# Altium PCB mini_backplane.PcbDoc (part 4 of 5)
Units mm, origin at the board's own origin, x right, y up, seen from the top; angles counter-clockwise.
Board outline 232.03 x 195 mm, 5 copper layers (Top Layer, MidLayer1, GND, POWER, Bottom Layer); 241 components, 200 nets, 1637 pads, 676 vias.
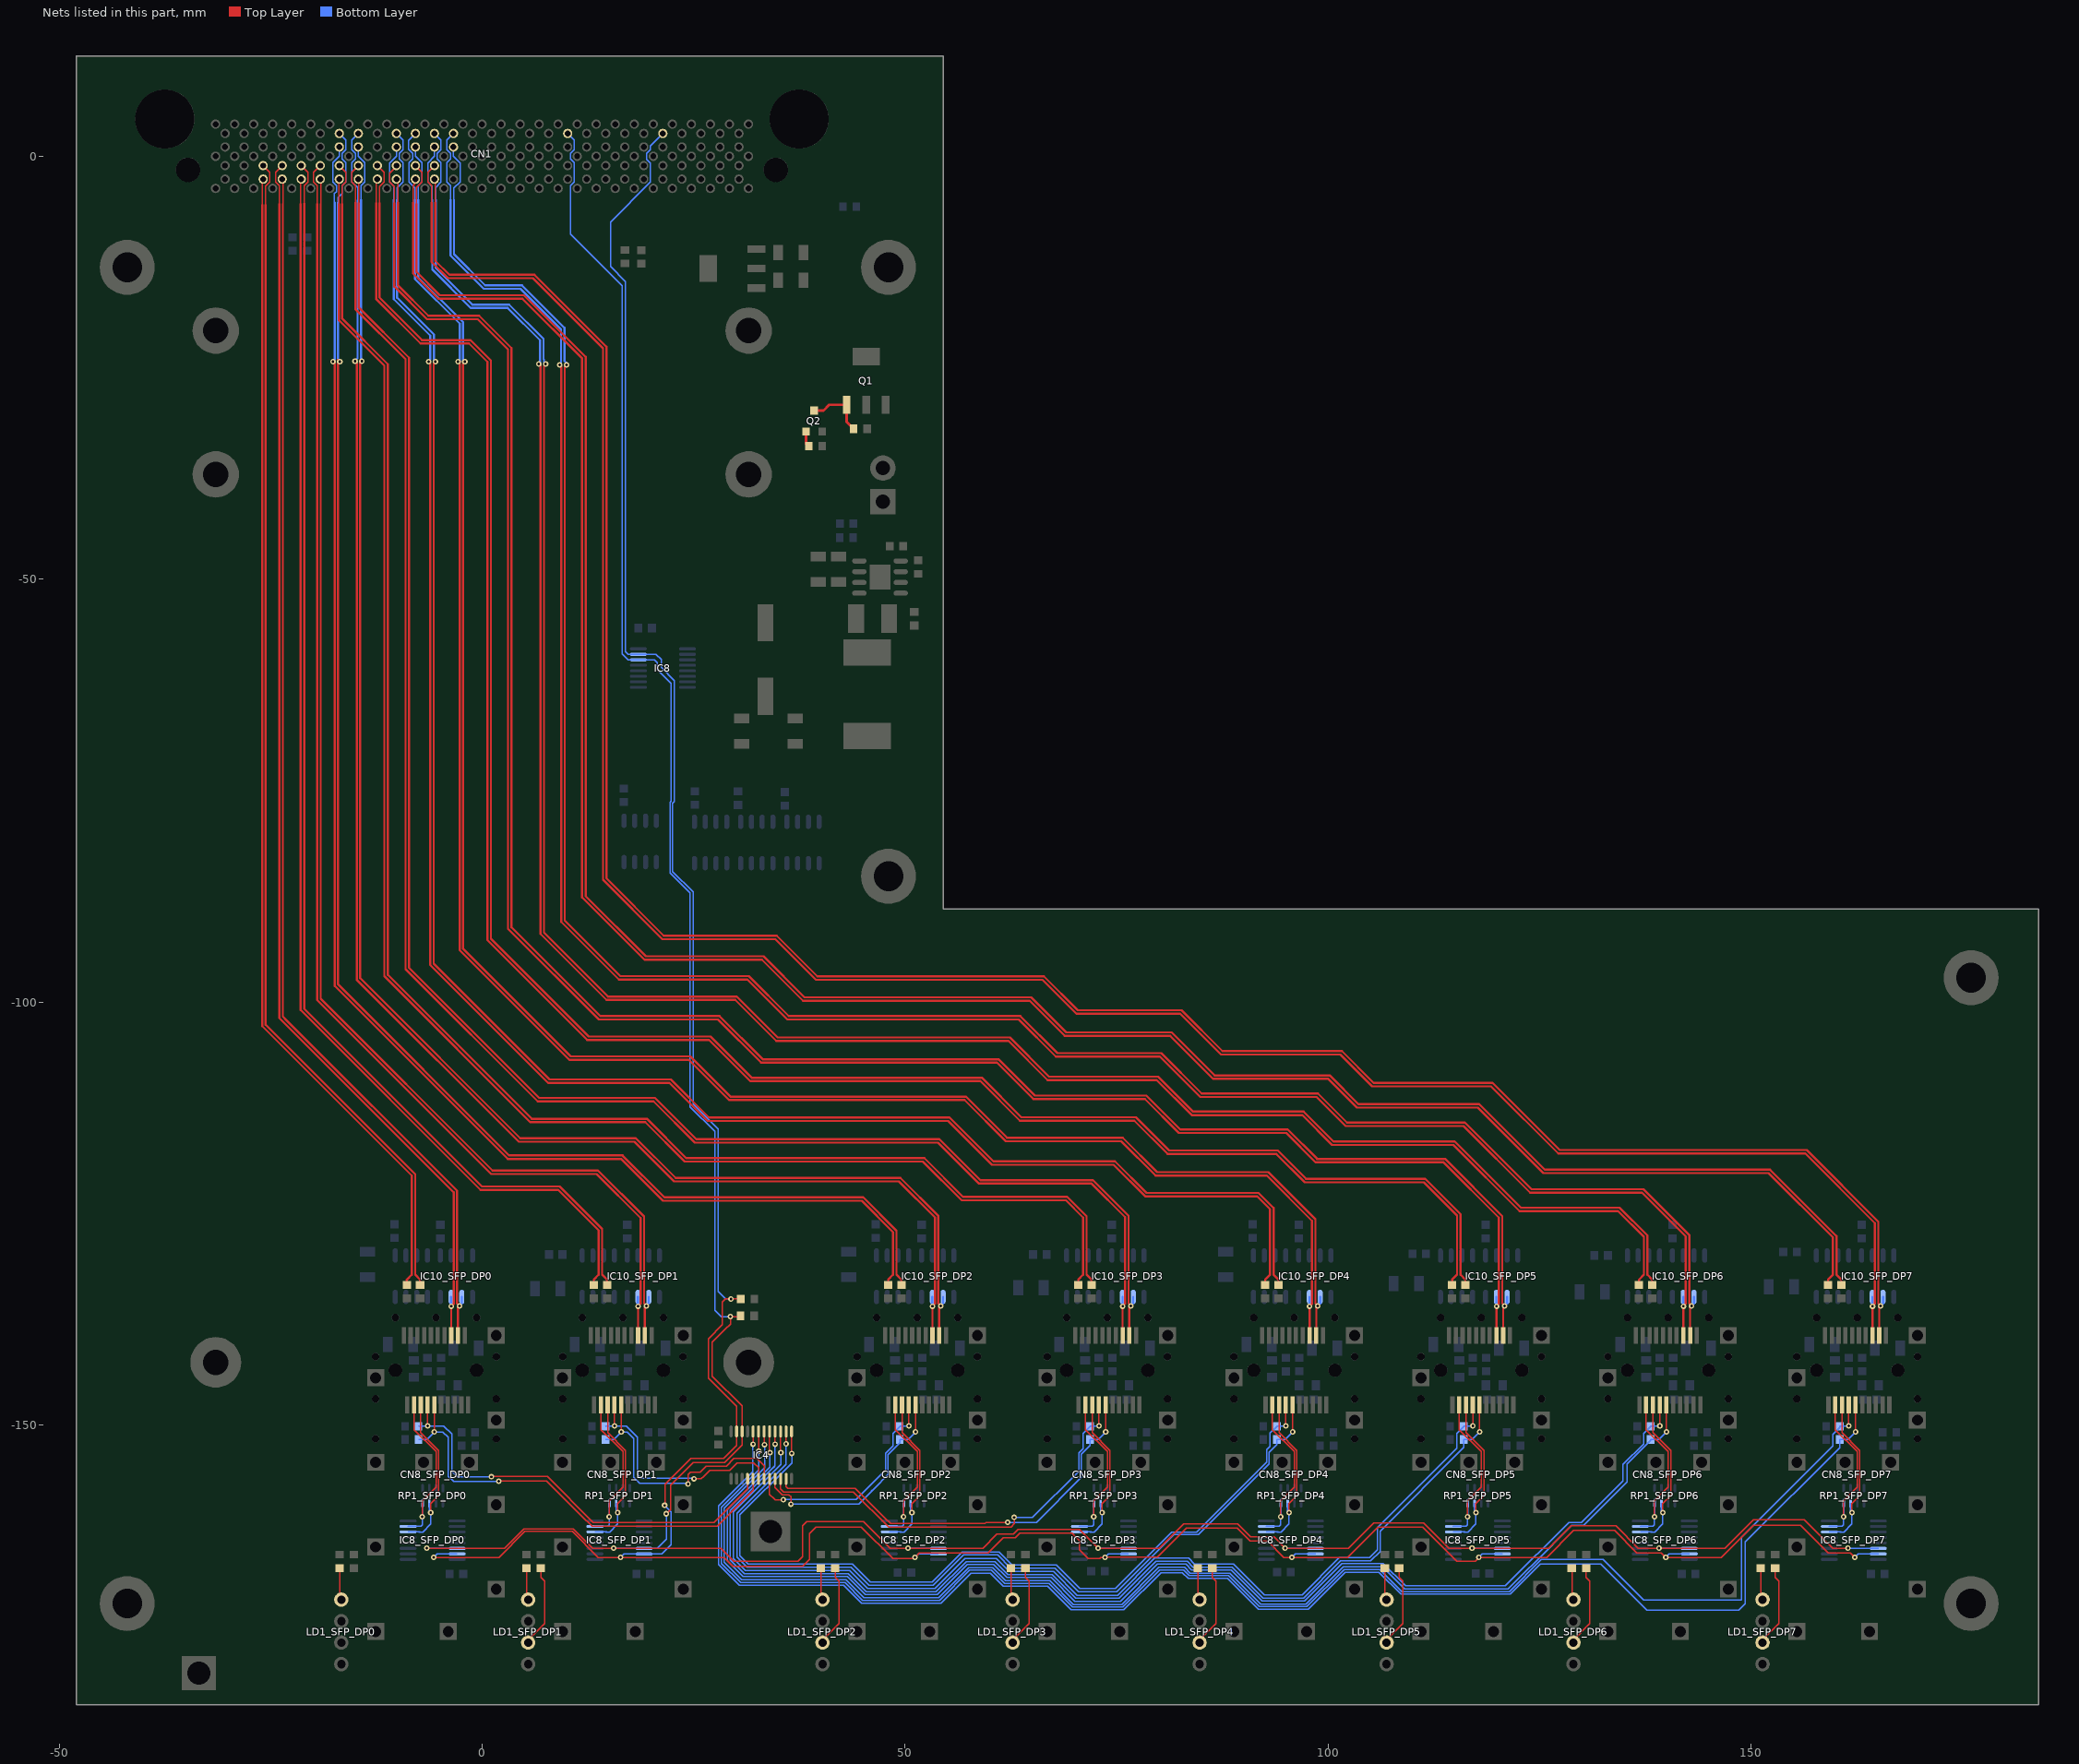
[diagram p6: the nets of this part, all layers, seen from the top]

## Via types
v1: diameter 0.66, hole 0.305, Top Layer to Bottom Layer, tented both sides, 576 vias
v2: diameter 0.711, hole 0.33, Top Layer to Bottom Layer, tented both sides, 97 vias
v3: diameter 0.66, hole 0.305, Top Layer to Bottom Layer, 3 vias

## Nets (pads, with @x,y where several pads share a name; then routed paths per layer and width w, separated by ;. In a path a pad name is that pad's centre, name@x,y a point inside that pad or via, vN(x,y) a via of type N, cw(c..) or ccw(c..) an arc to the next point about the centre after c; other vN are vias at no path point) (continued)
NetLD1_SFP_DP0_4: LD1_SFP_DP0.4 R10_SFP_DP0.2 | length 3.6
  Top Layer w0.152: R10_SFP_DP0.2@-16.841,-166.957 -16.815,-166.982 LD1_SFP_DP0.4@-16.815,-170.551
NetLD1_SFP_DP1_2: LD1_SFP_DP1.2 R9_SFP_DP1.2 | length 9.7
  Top Layer w0.152: LD1_SFP_DP1.2@5.283,-175.631 7.391,-173.523 7.391,-168.493 6.959,-168.062 R9_SFP_DP1.2@6.959,-166.957
NetLD1_SFP_DP1_4: LD1_SFP_DP1.4 R10_SFP_DP1.2 | length 3.6
  Top Layer w0.152: R10_SFP_DP1.2@5.257,-166.957 5.283,-166.982 LD1_SFP_DP1.4@5.283,-170.551
NetLD1_SFP_DP2_2: LD1_SFP_DP2.2 R9_SFP_DP2.2 | length 9.7
  Top Layer w0.152: LD1_SFP_DP2.2@40.081,-175.631 42.189,-173.523 42.189,-168.493 41.757,-168.062 R9_SFP_DP2.2@41.757,-166.957
NetLD1_SFP_DP2_4: LD1_SFP_DP2.4 R10_SFP_DP2.2 | length 3.6
  Top Layer w0.152: LD1_SFP_DP2.4@40.081,-170.551 R10_SFP_DP2.2@40.081,-166.982
NetLD1_SFP_DP3_2: LD1_SFP_DP3.2 R9_SFP_DP3.2 | length 9.7
  Top Layer w0.152: LD1_SFP_DP3.2@62.56,-175.631 64.668,-173.523 64.668,-168.493 64.236,-168.062 R9_SFP_DP3.2@64.236,-166.957
NetLD1_SFP_DP3_4: LD1_SFP_DP3.4 R10_SFP_DP3.2 | length 3.6
  Top Layer w0.152: R10_SFP_DP3.2@62.534,-166.957 62.56,-166.982 LD1_SFP_DP3.4@62.56,-170.551
NetLD1_SFP_DP4_2: LD1_SFP_DP4.2 R9_SFP_DP4.2 | length 9.7
  Top Layer w0.152: LD1_SFP_DP4.2@84.658,-175.631 86.766,-173.523 86.766,-168.493 86.334,-168.062 R9_SFP_DP4.2@86.334,-166.957
NetLD1_SFP_DP4_4: LD1_SFP_DP4.4 R10_SFP_DP4.2 | length 3.6
  Top Layer w0.152: R10_SFP_DP4.2@84.632,-166.957 84.658,-166.982 LD1_SFP_DP4.4@84.658,-170.551
NetLD1_SFP_DP5_2: LD1_SFP_DP5.2 R9_SFP_DP5.2 | length 9.7
  Top Layer w0.152: LD1_SFP_DP5.2@106.756,-175.631 108.864,-173.523 108.864,-168.493 108.432,-168.062 R9_SFP_DP5.2@108.432,-166.957
NetLD1_SFP_DP5_4: LD1_SFP_DP5.4 R10_SFP_DP5.2 | length 3.6
  Top Layer w0.152: R10_SFP_DP5.2@106.73,-166.957 106.756,-166.982 LD1_SFP_DP5.4@106.756,-170.551
NetLD1_SFP_DP6_2: LD1_SFP_DP6.2 R9_SFP_DP6.2 | length 9.7
  Top Layer w0.152: LD1_SFP_DP6.2@128.854,-175.631 130.962,-173.523 130.962,-168.493 130.53,-168.062 R9_SFP_DP6.2@130.53,-166.957
NetLD1_SFP_DP6_4: LD1_SFP_DP6.4 R10_SFP_DP6.2 | length 3.6
  Top Layer w0.152: R10_SFP_DP6.2@128.828,-166.957 128.854,-166.982 LD1_SFP_DP6.4@128.854,-170.551
NetLD1_SFP_DP7_2: LD1_SFP_DP7.2 R9_SFP_DP7.2 | length 9.7
  Top Layer w0.152: LD1_SFP_DP7.2@151.206,-175.631 153.314,-173.523 153.314,-168.493 152.882,-168.062 R9_SFP_DP7.2@152.882,-166.957
NetLD1_SFP_DP7_4: LD1_SFP_DP7.4 R10_SFP_DP7.2 | length 3.6
  Top Layer w0.152: R10_SFP_DP7.2@151.18,-166.957 151.206,-166.982 LD1_SFP_DP7.4@151.206,-170.551
NetQ1_1: Q1.1 Q2.3 R6.1 | length 7.3
  Top Layer w0.305: Q2.3@39.268,-30.058 40.366,-30.058 41.041,-29.383 Q1.1@43.115,-29.383 43.115,-31.408 R6.1@43.929,-32.222
NetQ2_1: Q2.1 R11.1 | length 1.8
  Top Layer w0.305: Q2.1@38.318,-32.558 38.318,-33.977 R11.1@38.62,-34.28
RD_OUT_SFP_DP0_N: CN1.159 CN8_SFP_DP0.12 IC10_SFP_DP0.2 | length 148.6
  Top Layer w0.152: CN1.159@-23.625,-2.7 -23.546,-2.779 -23.546,-5.654
  Top Layer w0.254: -23.546,-5.654 -23.546,-101.726 -22.891,-102.382 ; -23.297,-101.976 -22.891,-102.382 ; -2.843,-138.293 CN8_SFP_DP0.12@-2.843,-139.44 -2.843,-137.124 ; -2.843,-136.919 -2.843,-137.124 ; -22.891,-102.382 -2.947,-122.326 -2.947,-135.651 v1(-2.667,-135.931) -2.843,-136.107 -2.843,-137.124
  Bottom Layer w0.254: v1(-2.667,-135.931) -2.388,-135.651 IC10_SFP_DP0.2@-2.388,-134.875
RD_OUT_SFP_DP0_P: CN1.160 CN8_SFP_DP0.13 IC10_SFP_DP0.3 | length 149.8
  Top Layer w0.152: -23.953,-5.629 -23.953,-3.474 -24.404,-3.022 -24.404,-1.878 CN1.160@-23.625,-1.1
  Top Layer w0.254: -23.953,-5.629 -23.953,-101.895 -3.353,-122.494 -3.353,-135.702 v1(-3.633,-135.981) ; -3.643,-138.293 CN8_SFP_DP0.13@-3.643,-139.44 v1@-3.643,-135.992
  Bottom Layer w0.254: IC10_SFP_DP0.3@-3.658,-134.875 -3.658,-135.956 v1(-3.633,-135.981)
RD_OUT_SFP_DP1_N: CN1.153 CN8_SFP_DP1.12 IC10_SFP_DP1.2 | length 162.6
  Top Layer w0.152: CN1.153@-19.125,-2.7 -19.076,-2.749 -19.076,-5.629
  Top Layer w0.254: -19.076,-5.629 -19.076,-99.609 1.244,-119.929 13.706,-119.929 19.151,-125.374 19.151,-135.651 v1(19.431,-135.931) 19.255,-136.107 19.255,-137.124 ; 19.255,-138.293 CN8_SFP_DP1.12@19.255,-139.44 19.255,-137.124 ; 19.255,-136.919 19.255,-137.124
  Bottom Layer w0.254: v1(19.431,-135.931) 19.71,-135.651 IC10_SFP_DP1.2@19.71,-134.875
RD_OUT_SFP_DP1_P: CN1.154 CN8_SFP_DP1.13 IC10_SFP_DP1.3 | length 164.3
  Top Layer w0.152: -19.482,-5.654 -19.472,-5.644 -19.472,-3.455 -19.904,-3.022 -19.904,-1.878 CN1.154@-19.125,-1.1
  Top Layer w0.254: -19.482,-5.654 -19.482,-99.777 1.076,-120.335 13.538,-120.335 18.745,-125.542 18.745,-135.702 v1(18.465,-135.981) ; 18.455,-138.293 CN8_SFP_DP1.13@18.455,-139.44 v1@18.455,-135.992
  Bottom Layer w0.254: IC10_SFP_DP1.3@18.44,-134.875 18.44,-135.956 v1(18.465,-135.981)
RD_OUT_SFP_DP2_N: CN1.24 CN8_SFP_DP2.12 IC10_SFP_DP2.2 | length 196.1
  Top Layer w0.254: v1(-14.199,-24.221) -14.402,-24.425 -14.402,-97.196 4.521,-116.119 18.186,-116.119 22.885,-120.818 49.453,-120.818 53.949,-125.313 53.949,-135.651 v1(54.229,-135.931) 54.053,-136.107 54.053,-137.124 ; 54.053,-138.293 CN8_SFP_DP2.12@54.053,-139.44 54.053,-137.124 ; 54.053,-136.919 54.053,-137.124
  Bottom Layer w0.152: CN1.24@-14.625,1.1 -14.625,0.024 -13.847,-0.755 -13.847,-3.045 -14.301,-3.499 -14.301,-5.552
  Bottom Layer w0.254: -14.301,-5.171 -14.301,-5.552 -14.301,-24.12 v1(-14.199,-24.221) ; v1(54.229,-135.931) 54.508,-135.651 IC10_SFP_DP2.2@54.508,-134.875
RD_OUT_SFP_DP2_P: CN1.23 CN8_SFP_DP2.13 IC10_SFP_DP2.3 | length 197.7
  Top Layer w0.254: v1(-15.012,-24.221) -14.809,-24.425 -14.809,-97.364 4.352,-116.525 18.018,-116.525 22.717,-121.224 49.285,-121.224 53.543,-125.482 53.543,-135.702 v1(53.263,-135.981) ; 53.253,-138.293 CN8_SFP_DP2.13@53.253,-139.44 v1@53.253,-135.992
  Bottom Layer w0.152: -14.707,-5.375 -14.707,-3.72 -15.404,-3.023 -15.404,-0.755 -14.972,-0.322 -14.972,0.345 -15.404,0.778 -15.404,1.922 CN1.23@-14.625,2.7
  Bottom Layer w0.254: v1(-15.012,-24.221) -15.012,-24.172 -14.707,-23.867 -14.707,-5.375 -14.707,-5.222 ; v1@53.238,-135.956 IC10_SFP_DP2.3@53.238,-134.875
RD_OUT_SFP_DP3_N: CN1.147 CN8_SFP_DP3.12 IC10_SFP_DP3.2 | length 209.8
  Top Layer w0.152: CN1.147@-14.625,-2.7 -14.565,-2.761 -14.565,-5.562
  Top Layer w0.254: -14.565,-5.562 -14.565,-17.896 -8.636,-23.824 -8.636,-95.951 6.756,-111.343 20.447,-111.343 25.323,-116.22 54.076,-116.22 58.928,-121.072 72.228,-121.072 76.428,-125.272 76.428,-135.651 v1(76.708,-135.931) 76.532,-136.107 76.532,-137.124 ; 76.532,-138.293 CN8_SFP_DP3.12@76.532,-139.44 76.532,-137.124 ; 76.532,-136.919 76.532,-137.124
  Bottom Layer w0.254: v1(76.708,-135.931) 76.987,-135.651 IC10_SFP_DP3.2@76.987,-134.875
RD_OUT_SFP_DP3_P: CN1.148 CN8_SFP_DP3.13 IC10_SFP_DP3.3 | length 211.6
  Top Layer w0.152: -14.971,-5.502 -14.971,-3.478 -15.404,-3.045 -15.404,-1.878 CN1.148@-14.625,-1.1
  Top Layer w0.254: -14.971,-5.502 -14.971,-18.065 -9.043,-23.993 -9.043,-96.119 6.588,-111.75 20.278,-111.75 25.155,-116.627 53.908,-116.627 58.759,-121.478 72.059,-121.478 76.022,-125.44 76.022,-135.702 v1(75.742,-135.981) ; 75.732,-138.293 CN8_SFP_DP3.13@75.732,-139.44 v1@75.732,-135.992
  Bottom Layer w0.254: IC10_SFP_DP3.3@75.717,-134.875 75.717,-135.956 v1(75.742,-135.981)
RD_OUT_SFP_DP4_N: CN1.33 CN8_SFP_DP4.12 IC10_SFP_DP4.2 | length 228.6
  Top Layer w0.254: v1(-2.032,-24.298) -2.236,-24.501 -2.236,-93.716 10.49,-106.441 24.612,-106.441 29.362,-111.191 57.2,-111.191 62.077,-116.068 75.742,-116.068 79.806,-120.132 92.954,-120.132 98.526,-125.704 98.526,-135.651 v1(98.806,-135.931) 98.63,-136.107 98.63,-137.124 ; 98.63,-138.293 CN8_SFP_DP4.12@98.63,-139.44 98.63,-137.124 ; 98.63,-136.919 98.63,-137.124
  Bottom Layer w0.152: CN1.33@-7.875,1.1 -7.875,0.024 -7.097,-0.755 -7.097,-3.045 -7.529,-3.477 -7.529,-5.425
  Bottom Layer w0.254: -7.53,-5.146 -7.53,-5.425 -7.53,-14.33 -2.236,-19.624 -2.236,-23.612 ; -2.236,-23.764 -2.236,-23.612 ; v1(-2.032,-24.298) -2.236,-24.094 -2.236,-23.612 ; v1(98.806,-135.931) 99.085,-135.651 IC10_SFP_DP4.2@99.085,-134.875
RD_OUT_SFP_DP4_P: CN1.32 CN8_SFP_DP4.13 IC10_SFP_DP4.3 | length 230.9
  Top Layer w0.254: v1@-2.642,-24.298 v1(-2.845,-24.298) -2.642,-24.501 -2.642,-93.884 10.321,-106.848 24.444,-106.848 29.194,-111.597 57.032,-111.597 61.909,-116.474 75.574,-116.474 79.638,-120.538 92.786,-120.538 98.12,-125.872 98.12,-135.702 v1(97.84,-135.981) ; 97.83,-138.293 CN8_SFP_DP4.13@97.83,-139.44 v1@97.83,-135.992
  Bottom Layer w0.152: -7.936,-5.146 -7.936,-3.74 -8.654,-3.022 -8.654,-0.755 -8.222,-0.322 -8.222,0.345 -8.705,0.828 -8.705,1.871 CN1.32@-7.875,2.7
  Bottom Layer w0.254: -7.936,-5.146 -7.936,-14.498 -2.642,-19.792 -2.642,-23.028 ; v1(-2.845,-24.298) -2.642,-24.094 -2.642,-23.028 ; -2.642,-23.764 -2.642,-23.028 ; IC10_SFP_DP4.3@97.815,-134.875 97.815,-135.956 v1(97.84,-135.981)
RD_OUT_SFP_DP5_N: CN1.141 CN8_SFP_DP5.12 IC10_SFP_DP5.2 | length 245.7
  Top Layer w0.152: CN1.141@-10.125,-2.7 -9.957,-2.868 -9.957,-5.502
  Top Layer w0.254: -9.957,-5.502 -9.957,-15.239 -6.334,-18.862 -0.34,-18.862 3.479,-22.681 3.479,-91.176 13.97,-101.666 28.067,-101.666 33.172,-106.771 61.061,-106.771 65.354,-111.064 78.536,-111.064 82.55,-115.077 95.25,-115.077 98.729,-118.557 113.858,-118.557 120.624,-125.323 120.624,-135.651 v1(120.904,-135.931) 120.728,-136.107 120.728,-137.124 ; 120.728,-138.293 CN8_SFP_DP5.12@120.728,-139.44 120.728,-137.124 ; 120.728,-136.919 120.728,-137.124
  Bottom Layer w0.254: v1(120.904,-135.931) 121.183,-135.651 IC10_SFP_DP5.2@121.183,-134.875
RD_OUT_SFP_DP5_P: CN1.142 CN8_SFP_DP5.13 IC10_SFP_DP5.3 | length 247.5
  Top Layer w0.152: -10.364,-5.552 -10.364,-3.585 -10.904,-3.045 -10.904,-1.978 -10.125,-1.199 CN1.142@-10.125,-1.1
  Top Layer w0.254: -10.364,-5.552 -10.364,-15.408 -6.503,-19.268 -0.508,-19.268 3.073,-22.85 3.073,-91.344 13.801,-102.072 27.898,-102.072 33.004,-107.178 60.893,-107.178 65.185,-111.47 78.368,-111.47 82.381,-115.484 95.081,-115.484 98.561,-118.963 113.69,-118.963 120.218,-125.491 120.218,-135.702 v1(119.938,-135.981) ; 119.928,-138.293 CN8_SFP_DP5.13@119.928,-139.44 v1@119.928,-135.992
  Bottom Layer w0.254: IC10_SFP_DP5.3@119.913,-134.875 119.913,-135.956 v1(119.938,-135.981)
RD_OUT_SFP_DP6_N: CN1.39 CN8_SFP_DP6.12 IC10_SFP_DP6.2 | length 263.2
  Top Layer w0.254: v1(9.982,-24.653) 9.779,-24.856 9.779,-90.363 16.357,-96.942 31.546,-96.942 36.271,-101.666 63.627,-101.666 68.021,-106.06 80.314,-106.06 85.09,-110.835 98.831,-110.835 102.26,-114.264 116.205,-114.264 124.079,-122.138 137.303,-122.138 142.722,-127.558 142.722,-135.651 v1(143.002,-135.931) 142.826,-136.107 142.826,-137.124 ; 142.826,-138.293 CN8_SFP_DP6.12@142.826,-139.44 142.826,-137.124 ; 142.826,-136.919 142.826,-137.124
  Bottom Layer w0.152: CN1.39@-3.375,1.1 -3.375,0.001 -2.597,-0.777 -2.597,-3.045 -3.315,-3.763 -3.315,-5.146
  Bottom Layer w0.254: -3.315,-5.146 -3.315,-11.572 0.368,-15.255 4.715,-15.255 9.753,-20.294 9.753,-24.196 9.982,-24.425 v1(9.982,-24.653) ; v1(143.002,-135.931) 143.281,-135.651 IC10_SFP_DP6.2@143.281,-134.875
RD_OUT_SFP_DP6_P: CN1.38 CN8_SFP_DP6.13 IC10_SFP_DP6.3 | length 266.1
  Top Layer w0.254: v1(9.169,-24.653) 9.372,-24.856 9.372,-90.531 16.189,-97.348 31.378,-97.348 36.102,-102.072 63.458,-102.072 67.852,-106.467 80.146,-106.467 84.921,-111.242 98.663,-111.242 102.092,-114.671 116.036,-114.671 123.91,-122.545 137.134,-122.545 142.316,-127.726 142.316,-135.702 v1(142.036,-135.981) ; 142.026,-138.293 CN8_SFP_DP6.13@142.026,-139.44 v1@142.026,-135.992
  Bottom Layer w0.152: -3.721,-5.146 -3.721,-3.455 -4.154,-3.022 -4.154,-0.755 -3.722,-0.322 -3.722,0.345 -4.154,0.778 -4.154,1.922 CN1.38@-3.375,2.7
  Bottom Layer w0.254: -3.721,-5.146 -3.721,-11.741 0.2,-15.662 4.546,-15.662 9.347,-20.462 9.347,-22.443 ; v1(9.169,-24.653) 9.347,-24.475 9.347,-22.443 ; 9.347,-23.891 9.347,-22.443 ; IC10_SFP_DP6.3@142.011,-134.875 142.011,-135.956 v1(142.036,-135.981)
RD_OUT_SFP_DP7_N: CN1.135 CN8_SFP_DP7.12 IC10_SFP_DP7.2 | length 287.2
  Top Layer w0.152: CN1.135@-5.625,-2.7 -5.512,-2.813 -5.512,-5.476
  Top Layer w0.254: -5.512,-5.552 -5.512,-12.36 ; -5.512,-5.476 -5.512,-12.36 ; 165.178,-138.293 CN8_SFP_DP7.12@165.178,-139.44 165.178,-137.124 ; 165.178,-136.919 165.178,-137.124 ; -5.512,-12.36 -3.861,-14.011 6.188,-14.011 14.706,-22.529 14.706,-85.385 21.488,-92.166 34.848,-92.166 39.649,-96.967 66.421,-96.967 70.434,-100.98 82.702,-100.98 87.528,-105.806 101.65,-105.806 105.41,-109.565 119.456,-109.565 127.406,-117.516 156.607,-117.516 165.074,-125.983 165.074,-135.651 v1(165.354,-135.931) 165.178,-136.107 165.178,-137.124
  Bottom Layer w0.254: v1(165.354,-135.931) 165.633,-135.651 IC10_SFP_DP7.2@165.633,-134.875
RD_OUT_SFP_DP7_P: CN1.136 CN8_SFP_DP7.13 IC10_SFP_DP7.3 | length 282.1
  Top Layer w0.152: -5.971,-5.476 -5.971,-3.455 -6.404,-3.022 -6.404,-1.878 CN1.136@-5.625,-1.1
  Top Layer w0.254: -5.971,-5.476 -5.971,-12.476 -4.03,-14.417 6.019,-14.417 14.3,-22.697 14.3,-85.553 21.32,-92.573 34.68,-92.573 39.481,-97.373 66.252,-97.373 70.265,-101.387 82.534,-101.387 87.36,-106.213 101.482,-106.213 105.241,-109.972 119.287,-109.972 127.238,-117.922 156.438,-117.922 164.668,-126.152 164.668,-135.702 v1(164.388,-135.981) ; 164.378,-138.293 CN8_SFP_DP7.13@164.378,-139.44 v1@164.378,-135.992
  Bottom Layer w0.254: IC10_SFP_DP7.3@164.363,-134.875 164.363,-135.956 v1(164.388,-135.981)
SCL_AUX: CN1.56 IC4.22 IC8.14 IC8_SFP_DP0.14 IC8_SFP_DP1.14 IC8_SFP_DP2.14 IC8_SFP_DP3.14 IC8_SFP_DP4.14 IC8_SFP_DP5.14 IC8_SFP_DP6.14 IC8_SFP_DP7.14 R3.1 | length 407.4
  Top Layer w0.152: v1(-6.528,-164.582) 2.667,-164.582 4.953,-162.296 10.794,-162.296 13.08,-164.582 v1(15.57,-164.582) 28.244,-164.582 29.794,-166.131 37.363,-166.131 37.922,-165.572 37.922,-161.94 38.404,-161.458 45.11,-161.458 48.234,-164.582 v1(50.368,-164.582) 59.207,-164.582 60.883,-162.905 62.814,-162.905 63.347,-162.372 70.637,-162.372 v1(72.847,-164.582) 80.086,-164.582 82.931,-161.737 89.331,-161.737 90.855,-163.261 93.624,-163.261 v1(94.945,-164.582) 102.438,-164.582 105.435,-161.585 111.328,-161.585 114.325,-164.582 v1(117.043,-164.582) 126.111,-164.582 128.752,-161.94 134.061,-161.94 136.702,-164.582 v1(139.141,-164.582) 146.913,-164.582 150.291,-161.204 156.311,-161.204 159.689,-164.582 v1(161.493,-164.582) ; v1(21.793,-160.518) 22.275,-160.035 22.275,-157.14 24.968,-154.447 28.676,-154.447 30.745,-152.379 IC4.22@30.745,-150.784 30.745,-147.778 27.228,-144.262 27.228,-140.223 28.676,-138.775 ; 29.006,-138.445 28.676,-138.775 ; R3.1@30.569,-137.124 30.492,-137.201 v1(29.362,-137.201) 29.362,-138.09 28.676,-138.775
  Bottom Layer w0.152: v1(-6.528,-164.582) -2.978,-164.582 IC8_SFP_DP0.14@-2.942,-164.617 ; CN1.56@10.125,2.7 10.903,1.922 10.903,0.778 10.471,0.345 10.471,-0.322 10.903,-0.755 10.903,-3.045 10.471,-3.477 10.471,-9.214 16.586,-15.329 16.586,-18.887 ; v1(15.57,-164.582) 19.12,-164.582 IC8_SFP_DP1.14@19.156,-164.617 20.691,-164.617 21.793,-163.515 v1(21.793,-160.518) ; 16.586,-18.405 16.586,-18.887 ; v1(29.362,-137.201) 28.27,-137.201 27.508,-136.439 27.508,-115.306 24.592,-112.39 24.592,-87.117 22.225,-84.75 22.225,-76.393 22.377,-76.241 22.377,-62.347 20.726,-60.696 20.726,-59.858 20.411,-59.543 IC8.14@18.486,-59.543 17.262,-59.543 16.586,-58.867 16.586,-18.887 ; v1(50.368,-164.582) 53.918,-164.582 IC8_SFP_DP2.14@53.954,-164.617 ; v1(72.847,-164.582) 76.397,-164.582 IC8_SFP_DP3.14@76.433,-164.617 ; v1(94.945,-164.582) 98.495,-164.582 IC8_SFP_DP4.14@98.531,-164.617 ; v1(117.043,-164.582) 120.593,-164.582 IC8_SFP_DP5.14@120.629,-164.617 ; v1(139.141,-164.582) 142.691,-164.582 IC8_SFP_DP6.14@142.727,-164.617 ; v1(161.493,-164.582) 165.043,-164.582 IC8_SFP_DP7.14@165.079,-164.617
SCL_SFP0: CN8_SFP_DP0.5 IC4.5 R22_SFP_DP0.1 | length 54.6
  Top Layer w0.152: CN8_SFP_DP0.5@-5.643,-147.64 -5.643,-150.836 v1(-5.639,-150.84) ; v1(1.981,-156.657) 7.645,-156.657 11.811,-160.823 11.813,-160.823 13.007,-162.016 18.719,-162.016 ; 19.659,-162.016 18.719,-162.016 ; IC4.5@32.045,-156.384 32.045,-157.759 27.787,-162.016 18.719,-162.016
  Bottom Layer w0.152: R22_SFP_DP0.1@-7.506,-151.729 -6.528,-151.729 v1(-5.639,-150.84) -4.623,-150.84 -3.988,-151.475 -3.988,-156.073 -3.353,-156.708 1.93,-156.708 v1(1.981,-156.657)
SCL_SFP1: CN8_SFP_DP1.5 IC4.7 R22_SFP_DP1.1 | length 31.3
  Top Layer w0.152: CN8_SFP_DP1.5@16.455,-147.64 16.455,-150.836 v1(16.459,-150.84) ; v1(24.358,-156.987) 24.358,-155.895 24.663,-155.59 25.781,-155.59 26.479,-154.892 28.892,-154.892 29.794,-153.99 32.512,-153.99 33.345,-154.823 IC4.7@33.345,-156.384
  Bottom Layer w0.152: R22_SFP_DP1.1@14.592,-151.729 15.57,-151.729 v1(16.459,-150.84) 17.17,-150.84 17.957,-151.628 17.957,-156.225 18.669,-156.936 24.307,-156.936 v1(24.358,-156.987)
SCL_SFP2: CN8_SFP_DP2.5 IC4.9 R22_SFP_DP2.1 | length 27.8
  Top Layer w0.152: IC4.9@34.645,-156.384 34.645,-157.418 35.483,-158.257 36.271,-158.257 36.525,-158.511 v1(36.525,-159.375) ; CN8_SFP_DP2.5@51.253,-147.64 51.253,-150.836 v1(51.257,-150.84)
  Bottom Layer w0.152: v1(36.525,-159.375) 44.526,-159.375 46.393,-157.508 ; 46.05,-157.851 46.393,-157.508 ; v1(51.257,-150.84) 50.368,-151.729 R22_SFP_DP2.1@49.39,-151.729 49.39,-152.123 48.006,-153.507 48.006,-155.895 46.393,-157.508
SCL_SFP3: CN8_SFP_DP3.5 IC4.11 R22_SFP_DP3.1 | length 50.3
  Top Layer w0.152: IC4.11@35.945,-156.384 35.945,-157.321 36.144,-157.521 44.119,-157.521 47.599,-161 47.625,-161 48.31,-161.686 59.436,-161.686 59.588,-161.534 v1(62.128,-161.534) ; CN8_SFP_DP3.5@73.732,-147.64 73.732,-150.836 v1(73.736,-150.84)
  Bottom Layer w0.152: v1(62.128,-161.534) 65.557,-161.534 70.866,-156.225 70.866,-153.457 71.869,-152.453 R22_SFP_DP3.1@71.869,-151.729 72.847,-151.729 v1(73.736,-150.84)
SCL_SFP4: CN8_SFP_DP4.5 IC4.14 R22_SFP_DP4.1 | length 99.8
  Top Layer w0.152: v1(35.941,-152.263) 35.945,-152.259 IC4.14@35.945,-150.784 ; CN8_SFP_DP4.5@95.83,-147.64 95.83,-150.836 v1(95.834,-150.84)
  Bottom Layer w0.152: v1(35.941,-152.263) 35.941,-154.656 30.124,-160.473 30.124,-165.643 31.324,-166.842 43.643,-166.842 45.751,-168.951 53.359,-168.951 56.915,-165.395 60.965,-165.395 62.515,-166.944 67.747,-166.944 70.541,-169.738 75.031,-169.738 81.788,-162.982 84.709,-162.982 93.065,-154.625 93.065,-153.253 93.967,-152.352 R22_SFP_DP4.1@93.967,-151.729 94.945,-151.729 v1(95.834,-150.84)
SCL_SFP5: CN8_SFP_DP5.5 IC4.16 R22_SFP_DP5.1 | length 128.1
  Top Layer w0.152: v1(34.645,-152.288) IC4.16@34.645,-150.784 ; CN8_SFP_DP5.5@117.928,-147.64 117.928,-150.836 v1(117.932,-150.84)
  Bottom Layer w0.152: 34.544,-154.94 34.244,-155.239 ; v1(34.645,-152.288) 34.645,-154.838 34.244,-155.239 ; v1(117.932,-150.84) 117.043,-151.729 R22_SFP_DP5.1@116.065,-151.729 116.065,-152.682 106.172,-162.575 106.172,-164.963 105.054,-166.08 101.509,-166.08 97.115,-170.475 92.338,-170.475 88.681,-166.817 84.033,-166.817 83.372,-166.157 79.695,-166.157 75.326,-170.525 70.215,-170.525 67.421,-167.731 62.189,-167.731 60.639,-166.182 57.241,-166.182 53.685,-169.738 45.425,-169.738 43.316,-167.63 30.997,-167.63 29.337,-165.969 29.337,-160.147 34.244,-155.239
SCL_SFP6: CN8_SFP_DP6.5 IC4.18 R22_SFP_DP6.1 | length 153.1
  Top Layer w0.152: IC4.18@33.345,-150.784 33.345,-152.283 v1(33.401,-152.339) ; CN8_SFP_DP6.5@140.026,-147.64 140.026,-150.836 v1(140.03,-150.84)
  Bottom Layer w0.152: v1(33.401,-152.339) 33.401,-155.077 28.625,-159.852 28.625,-166.264 30.703,-168.341 43.022,-168.341 45.13,-170.449 53.98,-170.449 57.536,-166.893 60.345,-166.893 61.894,-168.443 67.126,-168.443 69.92,-171.237 75.621,-171.237 79.99,-166.868 83.078,-166.868 83.738,-167.528 88.386,-167.528 92.044,-171.186 97.409,-171.186 101.804,-166.792 106.476,-166.792 109.093,-169.408 117.297,-169.408 ; 116.789,-169.408 117.297,-169.408 ; v1(140.03,-150.84) 139.141,-151.729 R22_SFP_DP6.1@138.163,-151.729 138.163,-151.834 135.356,-154.64 135.356,-156.759 130.225,-161.889 128.803,-161.889 126.568,-164.125 126.568,-164.15 121.31,-169.408 117.297,-169.408
SCL_SFP7: CN8_SFP_DP7.5 IC4.20 R22_SFP_DP7.1 | length 184
  Top Layer w0.152: IC4.20@32.045,-150.784 32.045,-152.278 v1(32.054,-152.288) ; CN8_SFP_DP7.5@162.378,-147.64 162.378,-150.836 v1(162.382,-150.84)
  Bottom Layer w0.152: v1(32.054,-152.288) 32.022,-152.321 32.022,-155.558 27.99,-159.589 27.99,-166.527 30.44,-168.976 42.759,-168.976 44.867,-171.084 54.243,-171.084 57.799,-167.528 60.082,-167.528 61.631,-169.078 66.863,-169.078 69.657,-171.872 75.884,-171.872 80.253,-167.503 82.815,-167.503 83.475,-168.163 88.123,-168.163 91.781,-171.821 97.672,-171.821 102.067,-167.427 106.045,-167.427 108.635,-170.017 121.563,-170.017 125.144,-166.436 132.257,-166.436 137.744,-171.922 148.59,-171.922 149.352,-171.16 149.352,-163.871 160.502,-152.72 160.502,-151.742 R22_SFP_DP7.1@160.515,-151.729 161.493,-151.729 v1(162.382,-150.84)
SDA_AUX: CN1.71 IC4.23 IC8.15 IC8_SFP_DP0.15 IC8_SFP_DP1.15 IC8_SFP_DP2.15 IC8_SFP_DP3.15 IC8_SFP_DP4.15 IC8_SFP_DP5.15 IC8_SFP_DP6.15 IC8_SFP_DP7.15 R4.1 | length 407.3
  Top Layer w0.152: v1(-5.715,-165.674) 2.006,-165.674 5.08,-162.601 10.668,-162.601 13.741,-165.674 v1(16.383,-165.674) 28.6,-165.674 29.641,-166.715 37.896,-166.715 38.709,-165.903 38.709,-162.88 39.497,-162.093 44.831,-162.093 48.564,-165.826 51.028,-165.826 v1(51.181,-165.674) 51.714,-165.141 59.842,-165.141 61.62,-163.363 63.042,-163.363 63.601,-162.804 69.748,-162.804 70.65,-163.706 70.65,-164.798 71.678,-165.826 72.999,-165.826 73.152,-165.674 v1(73.66,-165.674) 73.666,-165.668 79.838,-165.668 83.286,-162.22 89.281,-162.22 90.805,-163.744 92.862,-163.744 94.792,-165.674 v1(95.758,-165.674) 102.311,-165.674 105.892,-162.093 111.226,-162.093 115.265,-166.131 117.398,-166.131 v1(117.856,-165.674) 125.857,-165.674 129.032,-162.499 133.883,-162.499 136.525,-165.141 139.42,-165.141 v1(139.954,-165.674) 146.507,-165.674 150.317,-161.864 155.854,-161.864 159.131,-165.141 161.772,-165.141 v1(162.306,-165.674) ; v1(21.59,-159.527) 21.64,-159.476 21.64,-157.013 24.688,-153.965 28.575,-153.965 30.095,-152.445 IC4.23@30.095,-150.784 30.095,-147.814 26.746,-144.465 26.746,-139.817 28.422,-138.14 28.422,-135.499 28.803,-135.118 v1(29.438,-135.118) 30.569,-135.118 R4.1@30.594,-135.143
  Bottom Layer w0.152: v1(-5.715,-165.674) -5.308,-165.267 IC8_SFP_DP0.15@-2.942,-165.267 ; v1(16.383,-165.674) 16.79,-165.267 IC8_SFP_DP1.15@19.156,-165.267 21.235,-165.267 22.352,-164.15 22.352,-160.286 21.592,-159.527 v1(21.59,-159.527) ; 16.967,-18.786 16.967,-19.141 ; CN1.71@21.375,2.7 19.903,1.229 19.903,0.778 19.471,0.345 19.471,-0.345 19.903,-0.777 19.903,-3.045 15.189,-7.759 15.189,-13.02 16.967,-14.798 16.967,-19.141 ; v1(29.438,-135.118) 28.803,-135.118 27.914,-134.229 27.914,-115.026 24.942,-112.055 24.942,-86.985 22.529,-84.572 22.529,-76.519 22.758,-76.291 22.758,-62.017 21.183,-60.442 21.183,-59.502 20.574,-58.893 IC8.15@18.486,-58.893 17.272,-58.893 16.967,-58.588 16.967,-19.141 ; v1(51.181,-165.674) 51.588,-165.267 IC8_SFP_DP2.15@53.954,-165.267 ; v1(73.66,-165.674) 74.067,-165.267 IC8_SFP_DP3.15@76.433,-165.267 ; v1(95.758,-165.674) 96.165,-165.267 IC8_SFP_DP4.15@98.531,-165.267 ; v1(117.856,-165.674) 118.263,-165.267 IC8_SFP_DP5.15@120.629,-165.267 ; v1(139.954,-165.674) 140.361,-165.267 IC8_SFP_DP6.15@142.727,-165.267 ; v1(162.306,-165.674) 162.713,-165.267 IC8_SFP_DP7.15@165.079,-165.267
SDA_SFP0: CN8_SFP_DP0.4 IC4.4 R21_SFP_DP0.1 | length 51.7
  Top Layer w0.152: v1@-6.443,-150.112 CN8_SFP_DP0.4@-6.443,-147.64 ; v1(1.117,-156.149) 1.168,-156.098 7.721,-156.098 13.157,-161.534 19.558,-161.534 ; 19.659,-161.534 19.558,-161.534 ; IC4.4@31.395,-156.384 31.395,-157.571 27.432,-161.534 19.558,-161.534
  Bottom Layer w0.152: R21_SFP_DP0.1@-7.506,-150.18 -7.455,-150.129 v1(-6.427,-150.129) -4.522,-150.129 -3.556,-151.094 -3.556,-155.514 -2.921,-156.149 v1(1.117,-156.149)
SDA_SFP1: CN8_SFP_DP1.4 IC4.6 R21_SFP_DP1.1 | length 30.1
  Top Layer w0.152: CN8_SFP_DP1.4@15.655,-147.64 15.655,-150.112 v1(15.671,-150.129) ; v1(25.069,-156.378) 25.908,-156.378 26.212,-156.073 ; 25.958,-156.327 26.212,-156.073 ; IC4.6@32.695,-156.384 32.695,-155.087 32.105,-154.498 30.149,-154.498 29.273,-155.374 26.911,-155.374 26.212,-156.073
  Bottom Layer w0.152: R21_SFP_DP1.1@14.592,-150.18 14.643,-150.129 v1(15.671,-150.129) 17.043,-150.129 18.389,-151.475 18.389,-155.895 18.821,-156.327 21.463,-156.327 ; 23.088,-156.327 21.463,-156.327 ; v1(25.069,-156.378) 25.019,-156.327 21.463,-156.327
SDA_SFP2: CN8_SFP_DP2.4 IC4.8 R21_SFP_DP2.1 | length 26.8
  Top Layer w0.152: IC4.8@33.995,-156.384 33.995,-158.216 34.544,-158.765 ; 34.62,-158.841 34.544,-158.765 ; v1(35.61,-158.867) 34.645,-158.867 34.544,-158.765 ; CN8_SFP_DP2.4@50.453,-147.64 50.453,-150.112 v1(50.469,-150.129)
  Bottom Layer w0.152: v1(35.61,-158.867) 35.661,-158.816 36.756,-158.816 44.246,-158.816 47.701,-155.362 47.701,-153.381 48.564,-152.518 48.564,-151.005 R21_SFP_DP2.1@49.39,-150.18 49.441,-150.129 v1(50.469,-150.129)
SDA_SFP3: CN8_SFP_DP3.4 IC4.10 R21_SFP_DP3.1 | length 51.4
  Top Layer w0.152: IC4.10@35.295,-156.384 35.295,-157.56 35.661,-157.927 40.309,-157.927 ; 40.716,-157.927 40.309,-157.927 ; v1(62.915,-160.95) 62.941,-160.975 62.941,-161.686 62.534,-162.093 48.082,-162.093 43.916,-157.927 40.309,-157.927 ; CN8_SFP_DP3.4@72.932,-147.64 72.932,-150.112 v1(72.948,-150.129)
  Bottom Layer w0.152: v1@62.941,-160.975 65.074,-160.975 70.561,-155.489 70.561,-153.33 71.043,-152.848 71.043,-151.005 R21_SFP_DP3.1@71.869,-150.18 71.92,-150.129 v1(72.948,-150.129)
SDA_SFP4: CN8_SFP_DP4.4 IC4.13 R21_SFP_DP4.1 | length 98.6
  Top Layer w0.152: IC4.13@36.595,-150.784 36.595,-153.349 v1(36.626,-153.38) ; CN8_SFP_DP4.4@95.03,-147.64 95.03,-150.112 v1(95.046,-150.129)
  Bottom Layer w0.152: v1(36.626,-153.38) 36.626,-154.504 30.501,-160.629 30.501,-165.487 31.48,-166.465 43.799,-166.465 45.907,-168.573 53.203,-168.573 56.759,-165.017 61.122,-165.017 62.671,-166.567 67.903,-166.567 70.697,-169.361 74.875,-169.361 81.559,-162.677 84.505,-162.677 92.76,-154.422 92.76,-152.949 93.167,-152.542 93.167,-150.98 R21_SFP_DP4.1@93.967,-150.18 94.018,-150.129 v1(95.046,-150.129)
SDA_SFP5: CN8_SFP_DP5.4 IC4.15 R21_SFP_DP5.1 | length 126.5
  Top Layer w0.152: IC4.15@35.295,-150.784 35.295,-153.242 v1(35.331,-153.279) ; CN8_SFP_DP5.4@117.128,-147.64 117.128,-150.112 v1(117.144,-150.129)
  Bottom Layer w0.152: v1(35.331,-153.279) 35.331,-154.691 29.718,-160.304 29.718,-165.811 31.155,-167.249 43.474,-167.249 45.582,-169.357 53.528,-169.357 57.084,-165.801 60.797,-165.801 62.346,-167.35 67.579,-167.35 70.373,-170.144 75.168,-170.144 79.537,-165.776 83.53,-165.776 84.19,-166.436 88.839,-166.436 92.496,-170.094 96.957,-170.094 101.351,-165.699 104.952,-165.699 105.867,-164.785 105.867,-162.143 115.239,-152.771 115.239,-151.005 R21_SFP_DP5.1@116.065,-150.18 116.116,-150.129 v1(117.144,-150.129)
SDA_SFP6: CN8_SFP_DP6.4 IC4.17 R21_SFP_DP6.1 | length 151.3
  Top Layer w0.152: IC4.17@33.995,-150.784 33.995,-153.263 v1(34.036,-153.304) ; CN8_SFP_DP6.4@139.226,-147.64 139.226,-150.112 v1(139.242,-150.129)
  Bottom Layer w0.152: v1(34.036,-153.304) 34.036,-154.981 29.006,-160.01 29.006,-166.106 30.861,-167.96 43.18,-167.96 45.288,-170.068 53.822,-170.068 57.378,-166.512 60.502,-166.512 62.052,-168.062 67.284,-168.062 70.078,-170.856 75.463,-170.856 79.832,-166.487 83.235,-166.487 83.896,-167.147 88.544,-167.147 92.202,-170.805 97.252,-170.805 101.646,-166.411 106.527,-166.411 109.169,-169.052 120.98,-169.052 128.473,-161.559 129.971,-161.559 134.874,-156.657 134.874,-154.692 137.312,-152.253 137.312,-151.031 R21_SFP_DP6.1@138.163,-150.18 138.214,-150.129 v1(139.242,-150.129)
SDA_SFP7: CN8_SFP_DP7.4 IC4.19 R21_SFP_DP7.1 | length 182.1
  Top Layer w0.152: IC4.19@32.695,-150.784 32.695,-153.106 v1(32.715,-153.126) ; CN8_SFP_DP7.4@161.578,-147.64 161.578,-150.112 v1(161.594,-150.129)
  Bottom Layer w0.152: v1(32.715,-153.126) 32.715,-155.332 28.321,-159.726 28.321,-166.39 30.577,-168.646 42.896,-168.646 45.004,-170.754 54.106,-170.754 57.662,-167.198 60.218,-167.198 61.768,-168.747 67,-168.747 69.794,-171.541 75.747,-171.541 80.116,-167.173 82.951,-167.173 83.612,-167.833 88.26,-167.833 91.918,-171.491 97.536,-171.491 101.93,-167.096 106.145,-167.096 108.762,-169.713 121.436,-169.713 125.246,-165.903 132.511,-165.903 137.337,-170.729 148.92,-170.729 148.92,-163.291 159.689,-152.521 159.689,-151.148 160.515,-150.322 R21_SFP_DP7.1@160.515,-150.18 160.566,-150.129 v1(161.594,-150.129)
SFP_TX0_N: C74_SFP_DP0.1 CN1.162 | length 138.4
  Top Layer w0.152: -25.985,-5.747 -25.985,-2.809 CN1.162@-25.875,-2.7
  Top Layer w0.254: -25.985,-5.747 -25.985,-102.86 -8.306,-120.538 -8.306,-132.248 -8.89,-132.832 C74_SFP_DP0.1@-8.89,-133.454
SFP_TX0_P: C73_SFP_DP0.1 CN1.163 | length 140.4
  Top Layer w0.152: CN1.163@-25.875,-1.1 -25.097,-1.878 -25.097,-3.022 -25.578,-3.504 -25.578,-5.781
  Top Layer w0.254: -25.578,-5.781 -25.578,-102.691 -7.9,-120.37 -7.9,-132.248 -7.316,-132.832 C73_SFP_DP0.1@-7.316,-133.454
SFP_TX1_N: C74_SFP_DP1.1 CN1.156 | length 151
  Top Layer w0.152: -21.436,-5.63 -21.436,-2.761 CN1.156@-21.375,-2.7
  Top Layer w0.254: -21.436,-5.63 -21.436,-100.957 -0.178,-122.215 9.017,-122.215 13.792,-126.99 13.792,-132.248 13.208,-132.832 C74_SFP_DP1.1@13.208,-133.454
SFP_TX1_P: C73_SFP_DP1.1 CN1.157 | length 153.1
  Top Layer w0.152: CN1.157@-21.375,-1.1 -20.597,-1.878 -20.597,-3.022 -21.03,-3.455 -21.03,-5.603
  Top Layer w0.254: -21.03,-5.603 -21.03,-100.788 -0.01,-121.808 9.185,-121.808 14.198,-126.821 14.198,-132.248 14.782,-132.832 C73_SFP_DP1.1@14.782,-133.454
SFP_TX2_N: C74_SFP_DP2.1 CN1.21 | length 185.2
  Top Layer w0.254: v1@-17.425,-24.323 v1@-17.425,-24.475 ; v1@-17.425,-24.272 v1(-17.628,-24.272) v1@-17.425,-24.475 ; C74_SFP_DP2.1@48.006,-133.454 48.006,-132.832 48.59,-132.248 48.59,-127.209 44.891,-123.51 21.396,-123.51 16.443,-118.557 3.032,-118.557 -17.425,-98.101 v1@-17.425,-24.475
  Bottom Layer w0.152: -17.425,-5.476 -17.45,-5.451 -17.45,-4.409 -17.222,-4.181 -17.222,-3.455 -17.654,-3.022 -17.654,-0.755 -16.875,0.024 CN1.21@-16.875,1.1
  Bottom Layer w0.254: v1(-17.628,-24.272) -17.425,-24.069 -17.425,-6.721 ; -17.425,-6.441 -17.425,-6.721 ; -17.425,-5.476 -17.425,-6.721
SFP_TX2_P: C73_SFP_DP2.1 CN1.20 | length 187.3
  Top Layer w0.254: v1(-16.815,-24.272) -16.976,-24.112 -17.018,-24.112 -17.018,-97.932 3.2,-118.151 16.611,-118.151 21.564,-123.104 45.059,-123.104 48.996,-127.041 48.996,-132.248 49.58,-132.832 C73_SFP_DP2.1@49.58,-133.454
  Bottom Layer w0.152: -17.018,-5.806 -17.018,-4.873 -16.529,-4.384 -16.529,-3.455 -16.097,-3.022 -16.097,-0.755 -16.529,-0.322 -16.529,0.345 -16.097,0.778 -16.097,1.922 CN1.20@-16.875,2.7
  Bottom Layer w0.254: -17.018,-5.476 -17.018,-5.806 -17.018,-24.069 v1(-16.815,-24.272)
SFP_TX3_N: C74_SFP_DP3.1 CN1.150 | length 199.4
  Top Layer w0.152: -16.936,-5.635 -16.936,-2.761 CN1.150@-16.875,-2.7
  Top Layer w0.254: -16.936,-5.635 -16.936,-19.376 -16.739,-19.573 ; -16.891,-19.421 -16.739,-19.573 ; C74_SFP_DP3.1@70.485,-133.454 70.485,-132.832 71.069,-132.248 71.069,-125.491 69.037,-123.459 56.718,-123.459 52.12,-118.862 23.952,-118.862 19.304,-114.214 5.699,-114.214 -11.557,-96.958 -11.557,-24.755 -16.739,-19.573
SFP_TX3_P: C73_SFP_DP3.1 CN1.151 | length 201.2
  Top Layer w0.152: CN1.151@-16.875,-1.1 -16.097,-1.878 -16.097,-3.022 -16.53,-3.455 -16.53,-5.629
  Top Layer w0.254: -16.53,-5.629 -16.53,-19.208 -11.151,-24.586 -11.151,-96.789 5.867,-113.807 19.472,-113.807 24.12,-118.455 52.289,-118.455 56.865,-123.032 69.184,-123.032 71.475,-125.323 71.475,-132.248 72.059,-132.832 C73_SFP_DP3.1@72.059,-133.454
SFP_TX4_N: C74_SFP_DP4.1 CN1.30 | length 219.8
  Top Layer w0.254: v1(-6.325,-24.272) -6.122,-24.475 -6.122,-95.637 7.807,-109.565 22.158,-109.565 26.654,-114.061 55.102,-114.061 60.283,-119.243 74.66,-119.243 78.393,-122.977 91.617,-122.977 93.167,-124.526 93.167,-132.248 92.583,-132.832 C74_SFP_DP4.1@92.583,-133.454
  Bottom Layer w0.152: -10.44,-5.298 -10.44,-3.509 -10.904,-3.045 -10.904,-0.777 -10.125,0.001 CN1.30@-10.125,1.1
  Bottom Layer w0.254: -10.44,-5.146 -10.44,-5.298 -10.44,-16.897 -6.122,-21.215 -6.122,-24.069 v1(-6.325,-24.272)
SFP_TX4_P: C73_SFP_DP4.1 CN1.29 | length 224.6
  Top Layer w0.254: v1(-5.512,-24.272) -5.715,-24.475 -5.715,-95.468 7.975,-109.159 22.326,-109.159 26.822,-113.655 55.27,-113.655 60.452,-118.836 74.828,-118.836 78.562,-122.57 91.786,-122.57 93.573,-124.358 93.573,-132.248 94.157,-132.832 C73_SFP_DP4.1@94.157,-133.454
  Bottom Layer w0.152: CN1.29@-10.125,2.7 -9.347,1.922 -9.347,0.755 -9.779,0.323 -9.779,-0.322 -9.347,-0.755 -9.347,-3.045 -10.033,-3.732 -10.033,-5.4
  Bottom Layer w0.254: -10.033,-5.146 -10.033,-5.4 -10.033,-16.728 -5.69,-21.072 ; -5.69,-23.764 -5.69,-21.072 ; v1(-5.512,-24.272) -5.69,-24.094 -5.69,-21.072
SFP_TX5_N: C74_SFP_DP5.1 CN1.144 | length 235.4
  Top Layer w0.152: -12.523,-5.527 -12.523,-2.847 CN1.144@-12.375,-2.7
  Top Layer w0.254: -12.523,-5.527 -12.523,-16.881 -7.265,-22.139 -1.55,-22.139 0.635,-24.323 0.635,-92.69 12.43,-104.485 26.831,-104.485 31.708,-109.362 58.912,-109.362 63.585,-114.036 77.123,-114.036 81.06,-117.973 93.903,-117.973 97.256,-121.326 111.328,-121.326 115.265,-125.263 115.265,-132.248 114.681,-132.832 C74_SFP_DP5.1@114.681,-133.454
SFP_TX5_P: C73_SFP_DP5.1 CN1.145 | length 237.5
  Top Layer w0.152: CN1.145@-12.375,-1.1 -11.597,-1.878 -11.597,-3.045 -12.116,-3.564 -12.116,-5.527
  Top Layer w0.254: -12.116,-5.527 -12.116,-16.712 -7.096,-21.732 -1.381,-21.732 1.041,-24.155 1.041,-92.522 12.598,-104.079 27,-104.079 31.877,-108.956 59.08,-108.956 63.754,-113.629 77.292,-113.629 81.229,-117.566 94.072,-117.566 97.425,-120.919 111.496,-120.919 115.671,-125.094 115.671,-132.248 116.255,-132.832 C73_SFP_DP5.1@116.255,-133.454
SFP_TX6_N: C74_SFP_DP6.1 CN1.36 | length 253.7
  Top Layer w0.254: v1(6.705,-24.552) 6.908,-24.755 6.908,-91.954 14.716,-99.761 29.93,-99.761 34.782,-104.612 62.239,-104.612 66.862,-109.235 79.765,-109.235 83.905,-113.375 96.961,-113.375 100.491,-116.906 114.833,-116.906 122.656,-124.729 134.315,-124.729 137.363,-127.777 137.363,-132.248 136.779,-132.832 C74_SFP_DP6.1@136.779,-133.454
  Bottom Layer w0.152: -5.881,-5.146 -5.881,-3.568 -6.404,-3.045 -6.404,-0.777 -5.625,0.001 CN1.36@-5.625,1.1
  Bottom Layer w0.254: -5.881,-5.146 -5.881,-13.378 -1.312,-17.948 3.048,-17.948 6.858,-21.758 6.858,-22.901 ; v1(6.705,-24.552) 6.858,-24.399 6.858,-22.901 ; 6.858,-23.79 6.858,-22.901
SFP_TX6_P: C73_SFP_DP6.1 CN1.35 | length 255
  Top Layer w0.254: v1(7.518,-24.552) 7.315,-24.755 7.315,-91.785 14.884,-99.355 30.099,-99.355 34.95,-104.206 62.407,-104.206 67.03,-108.829 79.933,-108.829 84.074,-112.969 97.129,-112.969 100.66,-116.5 115.001,-116.5 122.825,-124.323 134.483,-124.323 137.769,-127.609 137.769,-132.248 138.353,-132.832 C73_SFP_DP6.1@138.353,-133.454
  Bottom Layer w0.152: CN1.35@-5.625,2.7 -4.847,1.922 -4.847,0.755 -5.279,0.323 -5.279,-0.322 -4.847,-0.755 -4.847,-3.045 -5.475,-3.673 -5.475,-5.273
  Bottom Layer w0.254: -5.475,-5.146 -5.475,-5.273 -5.475,-13.21 -1.143,-17.541 3.216,-17.541 7.264,-21.589 7.264,-23.993 7.315,-24.044 7.315,-24.348 v1(7.518,-24.552)
SFP_TX7_N: C74_SFP_DP7.1 CN1.138 | length 269.6
  Top Layer w0.152: -8.154,-5.552 -8.154,-3.454 -7.874,-3.174 CN1.138@-7.875,-2.7 CN1.138@-7.875,-2.7
  Top Layer w0.254: -8.154,-5.476 -8.154,-5.552 -8.154,-13.849 -5.173,-16.83 4.775,-16.83 11.836,-23.891 11.836,-87.636 19.211,-95.011 33.105,-95.011 37.957,-99.863 64.754,-99.863 68.894,-104.003 81.356,-104.003 86.444,-109.091 100.042,-109.091 103.438,-112.486 117.713,-112.486 125.46,-120.233 152.095,-120.233 159.715,-127.853 159.715,-132.248 159.131,-132.832 C74_SFP_DP7.1@159.131,-133.454
SFP_TX7_P: C73_SFP_DP7.1 CN1.139 | length 271.6
  Top Layer w0.152: CN1.139@-7.875,-1.1 -7.097,-1.878 -7.097,-3.045 -7.747,-3.696 -7.747,-5.654
  Top Layer w0.254: -7.747,-5.654 -7.747,-13.68 -5.004,-16.424 4.943,-16.424 12.242,-23.723 12.242,-87.467 19.38,-94.605 33.274,-94.605 38.125,-99.456 64.922,-99.456 69.062,-103.596 81.524,-103.596 86.612,-108.684 100.211,-108.684 103.606,-112.08 117.881,-112.08 125.628,-119.827 152.263,-119.827 160.121,-127.685 160.121,-132.248 160.705,-132.832 C73_SFP_DP7.1@160.705,-133.454
TX_DISABLE_SFP_DP0: CN8_SFP_DP0.3 IC8_SFP_DP0.6 RP1_SFP_DP0.7 | length 19.8
  Top Layer w0.152: CN8_SFP_DP0.3@-7.243,-147.64 -7.243,-150.938 -5.131,-153.05 -5.131,-158.384 -6.071,-159.324 v1(-6.071,-160.365)
  Bottom Layer w0.152: IC8_SFP_DP0.6@-8.742,-162.667 -7.351,-162.667 -7.341,-162.677 ; -7.514,-162.677 -7.341,-162.677 ; RP1_SFP_DP0.7@-6.236,-159.273 -6.236,-160.2 v1(-6.071,-160.365) -6.071,-161.737 -7.011,-162.677 -7.341,-162.677
TX_DISABLE_SFP_DP1: CN8_SFP_DP1.3 IC8_SFP_DP1.6 RP1_SFP_DP1.7 | length 19.8
  Top Layer w0.152: CN8_SFP_DP1.3@14.855,-147.64 14.855,-150.938 16.967,-153.05 16.967,-158.384 16.027,-159.324 v1(16.027,-160.365)
  Bottom Layer w0.152: IC8_SFP_DP1.6@13.356,-162.667 14.747,-162.667 14.757,-162.677 ; 14.584,-162.677 14.757,-162.677 ; RP1_SFP_DP1.7@15.862,-159.273 15.862,-160.2 v1(16.027,-160.365) 16.027,-161.737 15.087,-162.677 14.757,-162.677
TX_DISABLE_SFP_DP2: CN8_SFP_DP2.3 IC8_SFP_DP2.6 RP1_SFP_DP2.7 | length 19.8
  Top Layer w0.152: CN8_SFP_DP2.3@49.653,-147.64 49.653,-150.938 51.765,-153.05 51.765,-158.384 50.825,-159.324 v1(50.825,-160.365)
  Bottom Layer w0.152: IC8_SFP_DP2.6@48.154,-162.667 49.545,-162.667 49.555,-162.677 ; 49.382,-162.677 49.555,-162.677 ; RP1_SFP_DP2.7@50.66,-159.273 50.66,-160.2 v1(50.825,-160.365) 50.825,-161.737 49.885,-162.677 49.555,-162.677
TX_DISABLE_SFP_DP3: CN8_SFP_DP3.3 IC8_SFP_DP3.6 RP1_SFP_DP3.7 | length 19.9
  Top Layer w0.152: CN8_SFP_DP3.3@72.132,-147.64 72.132,-150.938 74.244,-153.05 74.244,-158.384 73.304,-159.324 v1(73.304,-160.365)
  Bottom Layer w0.152: IC8_SFP_DP3.6@70.633,-162.667 72.024,-162.667 72.034,-162.677 ; 71.861,-162.677 72.034,-162.677 ; RP1_SFP_DP3.7@73.139,-159.273 73.139,-160.353 v1@73.304,-160.518 ; v1(73.304,-160.365) v1@73.304,-160.518 ; 72.034,-162.677 72.364,-162.677 73.304,-161.737 v1@73.304,-160.518
TX_DISABLE_SFP_DP4: CN8_SFP_DP4.3 IC8_SFP_DP4.6 RP1_SFP_DP4.7 | length 19.8
  Top Layer w0.152: CN8_SFP_DP4.3@94.23,-147.64 94.23,-150.938 96.342,-153.05 96.342,-158.384 95.402,-159.324 v1(95.402,-160.365)
  Bottom Layer w0.152: IC8_SFP_DP4.6@92.731,-162.667 94.122,-162.667 94.132,-162.677 ; 93.959,-162.677 94.132,-162.677 ; RP1_SFP_DP4.7@95.237,-159.273 95.237,-160.2 v1(95.402,-160.365) 95.402,-161.737 94.462,-162.677 94.132,-162.677
TX_DISABLE_SFP_DP5: CN8_SFP_DP5.3 IC8_SFP_DP5.6 RP1_SFP_DP5.7 | length 19.8
  Top Layer w0.152: CN8_SFP_DP5.3@116.328,-147.64 116.328,-150.938 118.44,-153.05 118.44,-158.384 117.5,-159.324 v1(117.5,-160.365)
  Bottom Layer w0.152: IC8_SFP_DP5.6@114.829,-162.667 116.22,-162.667 116.23,-162.677 ; 116.057,-162.677 116.23,-162.677 ; RP1_SFP_DP5.7@117.335,-159.273 117.335,-160.2 v1(117.5,-160.365) 117.5,-161.737 116.56,-162.677 116.23,-162.677
TX_DISABLE_SFP_DP6: CN8_SFP_DP6.3 IC8_SFP_DP6.6 RP1_SFP_DP6.7 | length 19.8
  Top Layer w0.152: CN8_SFP_DP6.3@138.426,-147.64 138.426,-150.938 140.538,-153.05 140.538,-158.384 139.598,-159.324 v1(139.598,-160.365)
  Bottom Layer w0.152: IC8_SFP_DP6.6@136.927,-162.667 138.318,-162.667 138.328,-162.677 ; 138.155,-162.677 138.328,-162.677 ; RP1_SFP_DP6.7@139.433,-159.273 139.433,-160.2 v1(139.598,-160.365) 139.598,-161.737 138.658,-162.677 138.328,-162.677
TX_DISABLE_SFP_DP7: CN8_SFP_DP7.3 IC8_SFP_DP7.6 RP1_SFP_DP7.7 | length 19.8
  Top Layer w0.152: CN8_SFP_DP7.3@160.778,-147.64 160.778,-150.938 162.89,-153.05 162.89,-158.384 161.95,-159.324 v1(161.95,-160.365)
  Bottom Layer w0.152: IC8_SFP_DP7.6@159.279,-162.667 160.67,-162.667 160.68,-162.677 ; 160.507,-162.677 160.68,-162.677 ; RP1_SFP_DP7.7@161.785,-159.273 161.785,-160.2 v1(161.95,-160.365) 161.95,-161.737 161.01,-162.677 160.68,-162.677
TX_FAULT_SFP_DP0: CN8_SFP_DP0.2 IC8_SFP_DP0.7 RP1_SFP_DP0.8 | length 19.3
  Top Layer w0.152: CN8_SFP_DP0.2@-8.043,-147.64 -8.043,-150.57 -5.436,-153.177 -5.436,-157.368 -7.062,-158.994 v1(-7.062,-160.873)
  Bottom Layer w0.152: IC8_SFP_DP0.7@-8.742,-162.016 -7.239,-162.016 -7.062,-161.839 v1(-7.062,-160.873) -7.036,-160.848 RP1_SFP_DP0.8@-7.036,-159.273
TX_FAULT_SFP_DP1: CN8_SFP_DP1.2 IC8_SFP_DP1.7 RP1_SFP_DP1.8 | length 19.3
  Top Layer w0.152: CN8_SFP_DP1.2@14.055,-147.64 14.055,-150.57 16.662,-153.177 16.662,-157.368 15.036,-158.994 v1(15.036,-160.873)
  Bottom Layer w0.152: IC8_SFP_DP1.7@13.356,-162.016 14.859,-162.016 15.036,-161.839 15.036,-161.026 15.062,-161 RP1_SFP_DP1.8@15.062,-159.273
TX_FAULT_SFP_DP2: CN8_SFP_DP2.2 IC8_SFP_DP2.7 RP1_SFP_DP2.8 | length 19.3
  Top Layer w0.152: CN8_SFP_DP2.2@48.853,-147.64 48.853,-150.57 51.46,-153.177 51.46,-157.368 49.834,-158.994 v1(49.834,-160.873)
  Bottom Layer w0.152: IC8_SFP_DP2.7@48.154,-162.016 49.657,-162.016 49.834,-161.839 v1(49.834,-160.873) 49.86,-160.848 RP1_SFP_DP2.8@49.86,-159.273
TX_FAULT_SFP_DP3: CN8_SFP_DP3.2 IC8_SFP_DP3.7 RP1_SFP_DP3.8 | length 19.3
  Top Layer w0.152: CN8_SFP_DP3.2@71.332,-147.64 71.332,-150.57 73.939,-153.177 73.939,-157.368 72.313,-158.994 v1(72.313,-160.873)
  Bottom Layer w0.152: IC8_SFP_DP3.7@70.633,-162.016 72.136,-162.016 72.313,-161.839 v1(72.313,-160.873) 72.339,-160.848 RP1_SFP_DP3.8@72.339,-159.273
TX_FAULT_SFP_DP4: CN8_SFP_DP4.2 IC8_SFP_DP4.7 RP1_SFP_DP4.8 | length 19.3
  Top Layer w0.152: CN8_SFP_DP4.2@93.43,-147.64 93.43,-150.57 96.037,-153.177 96.037,-157.368 94.411,-158.994 v1(94.411,-160.873)
  Bottom Layer w0.152: IC8_SFP_DP4.7@92.731,-162.016 94.234,-162.016 94.411,-161.839 v1(94.411,-160.873) 94.437,-160.848 RP1_SFP_DP4.8@94.437,-159.273
TX_FAULT_SFP_DP5: CN8_SFP_DP5.2 IC8_SFP_DP5.7 RP1_SFP_DP5.8 | length 19.3
  Top Layer w0.152: CN8_SFP_DP5.2@115.528,-147.64 115.528,-150.57 118.135,-153.177 118.135,-157.368 116.509,-158.994 v1(116.509,-160.873)
  Bottom Layer w0.152: IC8_SFP_DP5.7@114.829,-162.016 116.332,-162.016 116.509,-161.839 v1(116.509,-160.873) 116.535,-160.848 RP1_SFP_DP5.8@116.535,-159.273
TX_FAULT_SFP_DP6: CN8_SFP_DP6.2 IC8_SFP_DP6.7 RP1_SFP_DP6.8 | length 19.3
  Top Layer w0.152: CN8_SFP_DP6.2@137.626,-147.64 137.626,-150.57 140.233,-153.177 140.233,-157.368 138.607,-158.994 v1(138.607,-160.873)
  Bottom Layer w0.152: IC8_SFP_DP6.7@136.927,-162.016 138.43,-162.016 138.607,-161.839 v1(138.607,-160.873) 138.633,-160.848 RP1_SFP_DP6.8@138.633,-159.273
TX_FAULT_SFP_DP7: CN8_SFP_DP7.2 IC8_SFP_DP7.7 RP1_SFP_DP7.8 | length 19.3
  Top Layer w0.152: CN8_SFP_DP7.2@159.978,-147.64 159.978,-150.57 162.585,-153.177 162.585,-157.368 160.959,-158.994 v1(160.959,-160.873)
  Bottom Layer w0.152: IC8_SFP_DP7.7@159.279,-162.016 160.782,-162.016 160.959,-161.839 v1(160.959,-160.873) 160.985,-160.848 RP1_SFP_DP7.8@160.985,-159.273
pads on no net: CN1.3 CN1.6 CN1.8 CN1.11 CN1.12 CN1.41 CN1.44 CN1.45 CN1.47 CN1.48 CN1.50 CN1.51 CN1.53 CN1.54 CN1.59 CN1.60 CN1.62 CN1.63 CN1.65 CN1.66 CN1.68 CN1.69 CN1.74 CN1.75 CN1.77 CN1.78 CN1.80 CN1.81 CN1.83 CN1.86A CN1.87 CN1.88 CN1.89A CN1.90 CN1.91 CN1.93 CN1.94 CN1.96 CN1.97 CN1.99 CN1.100 CN1.102 CN1.103 CN1.108 CN1.109 CN1.111 CN1.112 CN1.114 CN1.115 CN1.117 CN1.118 CN1.120 CN1.121 CN1.123 CN1.124 CN1.126 CN1.127 CN1.129 CN1.130 CN1.132 CN1.133 CN1.165 CN1.166 CN1.167 CN1.168 CN1.169 CN1.170A CN1.M1 CN1.M2 CN1.M3 CN1.M4 CN1.nc CN8_SFP_DP0. CN8_SFP_DP1. CN8_SFP_DP2. CN8_SFP_DP3. CN8_SFP_DP4. CN8_SFP_DP5. CN8_SFP_DP6. CN8_SFP_DP7. IC5.4 IC6.4 IC7.4 IC8.9 IC8.10 IC8.11 IC8.12 IC8.13 IC9_SFP_DP0.4 IC9_SFP_DP1.4 IC9_SFP_DP2.4 IC9_SFP_DP3.4 IC9_SFP_DP4.4 IC9_SFP_DP5.4 IC9_SFP_DP6.4 IC9_SFP_DP7.4 IC10_SFP_DP0.4 IC10_SFP_DP1.4 IC10_SFP_DP2.4 IC10_SFP_DP3.4 IC10_SFP_DP4.4 IC10_SFP_DP5.4 IC10_SFP_DP6.4 IC10_SFP_DP7.4 IC11.2 IC11.3 IC13.4
copper on no net: | length 30
  Top Layer w0.254: 179.048,-165.133 182.048,-165.133 182.048,-162.133 179.048,-162.133 179.048,-165.133
  Bottom Layer w0.254: 179.048,-156.133 182.048,-156.133 ; 179.048,-156.133 179.048,-153.133 182.048,-153.133 182.048,-156.133 ; 179.048,-156.133 182.048,-156.133 ; 179.048,-156.133 182.048,-156.133

## Polygon pours and split planes (outlines as drawn)
+12V_MCH on Top Layer "poly_ext_gnd" (solid, pour order 1001): 41.548,-18.383 49.048,-18.383 49.548,-18.883 49.548,-24.133 46.798,-26.883 46.548,-27.133 46.548,-29.883 46.548,-30.383 46.048,-30.883 44.798,-30.883 44.298,-30.383 44.298,-27.383 44.298,-26.133 43.298,-25.133 41.048,-22.883 41.048,-18.883
+12V_PSU on Top Layer "poly_ext_gnd" (solid, pour order 1000): 47.048,-27.133 53.798,-27.133 53.798,-33.133 47.048,-33.133
NetC84_2 on Top Layer "poly_ext_gnd" (solid, pour order 1000): 42.298,-60.633 49.048,-60.633 49.298,-60.383 49.298,-57.383 48.798,-56.883 46.798,-56.883 46.298,-56.383 46.048,-56.133 46.048,-51.883 45.298,-51.133 43.548,-51.133 43.048,-51.133 42.798,-51.383 42.048,-52.133 42.048,-60.383
GND on Top Layer "poly_ext_gnd" (solid, pour order 1001): 46.548,-56.133 47.048,-56.633 49.798,-56.633 50.048,-56.383 50.048,-53.133 49.298,-52.383 48.798,-52.383 48.298,-51.883 48.298,-45.383 47.798,-44.883 38.548,-44.883 38.048,-45.383 38.048,-48.133 39.298,-49.383 46.048,-49.383 46.548,-49.883
+12V_PSU on Top Layer "poly_ext_gnd" (solid, pour order 1002): 44.5,-49.647 37.998,-49.647 37.566,-50.079 37.515,-50.129 37.515,-51.526 37.515,-51.831 37.846,-52.161 37.896,-52.212 40.233,-52.212 41.808,-52.212 42.367,-51.653 42.976,-51.044 45.694,-51.044 45.694,-49.647
GND on Top Layer "poly_ext_gnd" (solid, pour order 1003): 40.69,-44.872 32.156,-44.872 30.226,-46.802 30.226,-56.987 30.886,-57.648 31.673,-58.435 34.493,-58.435 36.017,-58.435 36.804,-57.648 37.007,-57.445 37.007,-49.85 37.465,-49.393 39.827,-49.393
+3V3 on Top Layer "poly_ext_gnd" (solid, pour order 1004): 42.548,-70.633 48.548,-70.633 49.048,-70.133 49.048,-66.633 48.548,-66.133 42.548,-66.133 39.048,-62.633 37.548,-61.133 32.548,-61.133 31.048,-61.133 29.048,-63.133 29.048,-67.133 29.548,-67.633 33.548,-67.633 39.548,-67.633 41.048,-69.133
GND on Top Layer "poly_ext_gnd" (solid, pour order 1005): 29.048,-68.633 38.548,-68.633 39.048,-69.133 39.048,-71.133 38.548,-71.633 29.548,-71.633 29.048,-71.133
+3V3_MP on Top Layer "poly_ext_gnd" (solid, pour order 1006): 32.385,-12.283 29.083,-12.283 28.041,-11.242 27.965,-11.166 25.501,-11.166 25.349,-11.166 24.866,-11.648 24.866,-15.103 25.222,-15.458 25.476,-15.712 26.593,-15.712 27.711,-15.712 28.981,-14.442 29.083,-14.341 31.521,-14.341 33.502,-14.341 33.934,-13.909 33.934,-12.614 33.629,-12.309 33.604,-12.283 32.08,-12.283
+3V3_MP on Top Layer "poly_ext_gnd" (solid, pour order 1007): 34.417,-15.738 35.788,-15.738 36.042,-15.484 36.042,-13.706 35.763,-13.426 35.483,-13.147 33.401,-13.147 33.401,-14.519 33.655,-14.773 33.934,-15.052 33.934,-15.23
+12V_PSU on Top Layer "poly_ext_gnd" (solid, pour order 1008): 31.038,-11.572 35.687,-11.572 36.068,-11.191 36.068,-9.896 35.763,-9.591 31.673,-9.591 31.292,-9.972 30.81,-10.455 30.81,-11.344
+3V3_MP on Bottom Layer "poly_ext_gnd" (solid, pour order 1009): 29.743,5.446 32.283,5.446 32.715,5.014 33.35,4.379 33.35,-2.708 33.35,-6.289 31.572,-8.067 27.762,-8.067 26.162,-9.667 25.73,-10.099 25.73,-13.325 25.73,-15.077 25.019,-15.789 24.739,-15.789 24.282,-15.331 23.952,-15.001 23.952,-9.616 29.743,-3.825 29.743,-1.692
GND on GND (split plane): 53.998,-34.354 46.075,-34.354 46.026,-34.363 45.984,-34.391 38.63,-41.745 30.505,-41.745 30.455,-41.755 30.413,-41.783 27.315,-44.882 27.287,-44.924 27.277,-44.973 27.277,-71.262 27.287,-71.312 27.315,-71.354 27.357,-71.382 27.406,-71.392 27.456,-71.382 27.498,-71.354 27.526,-71.312 27.536,-71.262 27.536,-45.027 30.559,-42.004 38.684,-42.004 38.733,-41.994 38.775,-41.966 46.129,-34.612 53.998,-34.612 53.998,-72.885 39.144,-72.885 38.979,-72.72 38.937,-72.692 38.887,-72.682 38.837,-72.692 38.795,-72.72 38.767,-72.762 38.758,-72.812 38.767,-72.861 38.795,-72.903 38.999,-73.106 39.041,-73.134 39.09,-73.144 53.998,-73.144 53.998,-88.991 54.007,-89.091 54.036,-89.187 54.084,-89.275 54.147,-89.352 54.224,-89.416 54.313,-89.463 54.408,-89.492 54.508,-89.502 183.538,-89.502 183.538,-182.613 -47.471,-182.613 -47.471,11.362 53.998,11.362
GND on GND (split plane): 181.919,-162.004 179.177,-162.004 179.177,-159.263 181.919,-159.263